# Altium PCB ButtonPad.PcbDoc
Units mil, origin at the board's own origin, x right, y up, seen from the top; angles counter-clockwise.
Board outline 3100 x 3810.63 mil, 2 copper layers (Top Layer, Bottom Layer), stack 61.756 mil thick; 21 components, 17 nets, 85 pads, 0 vias.
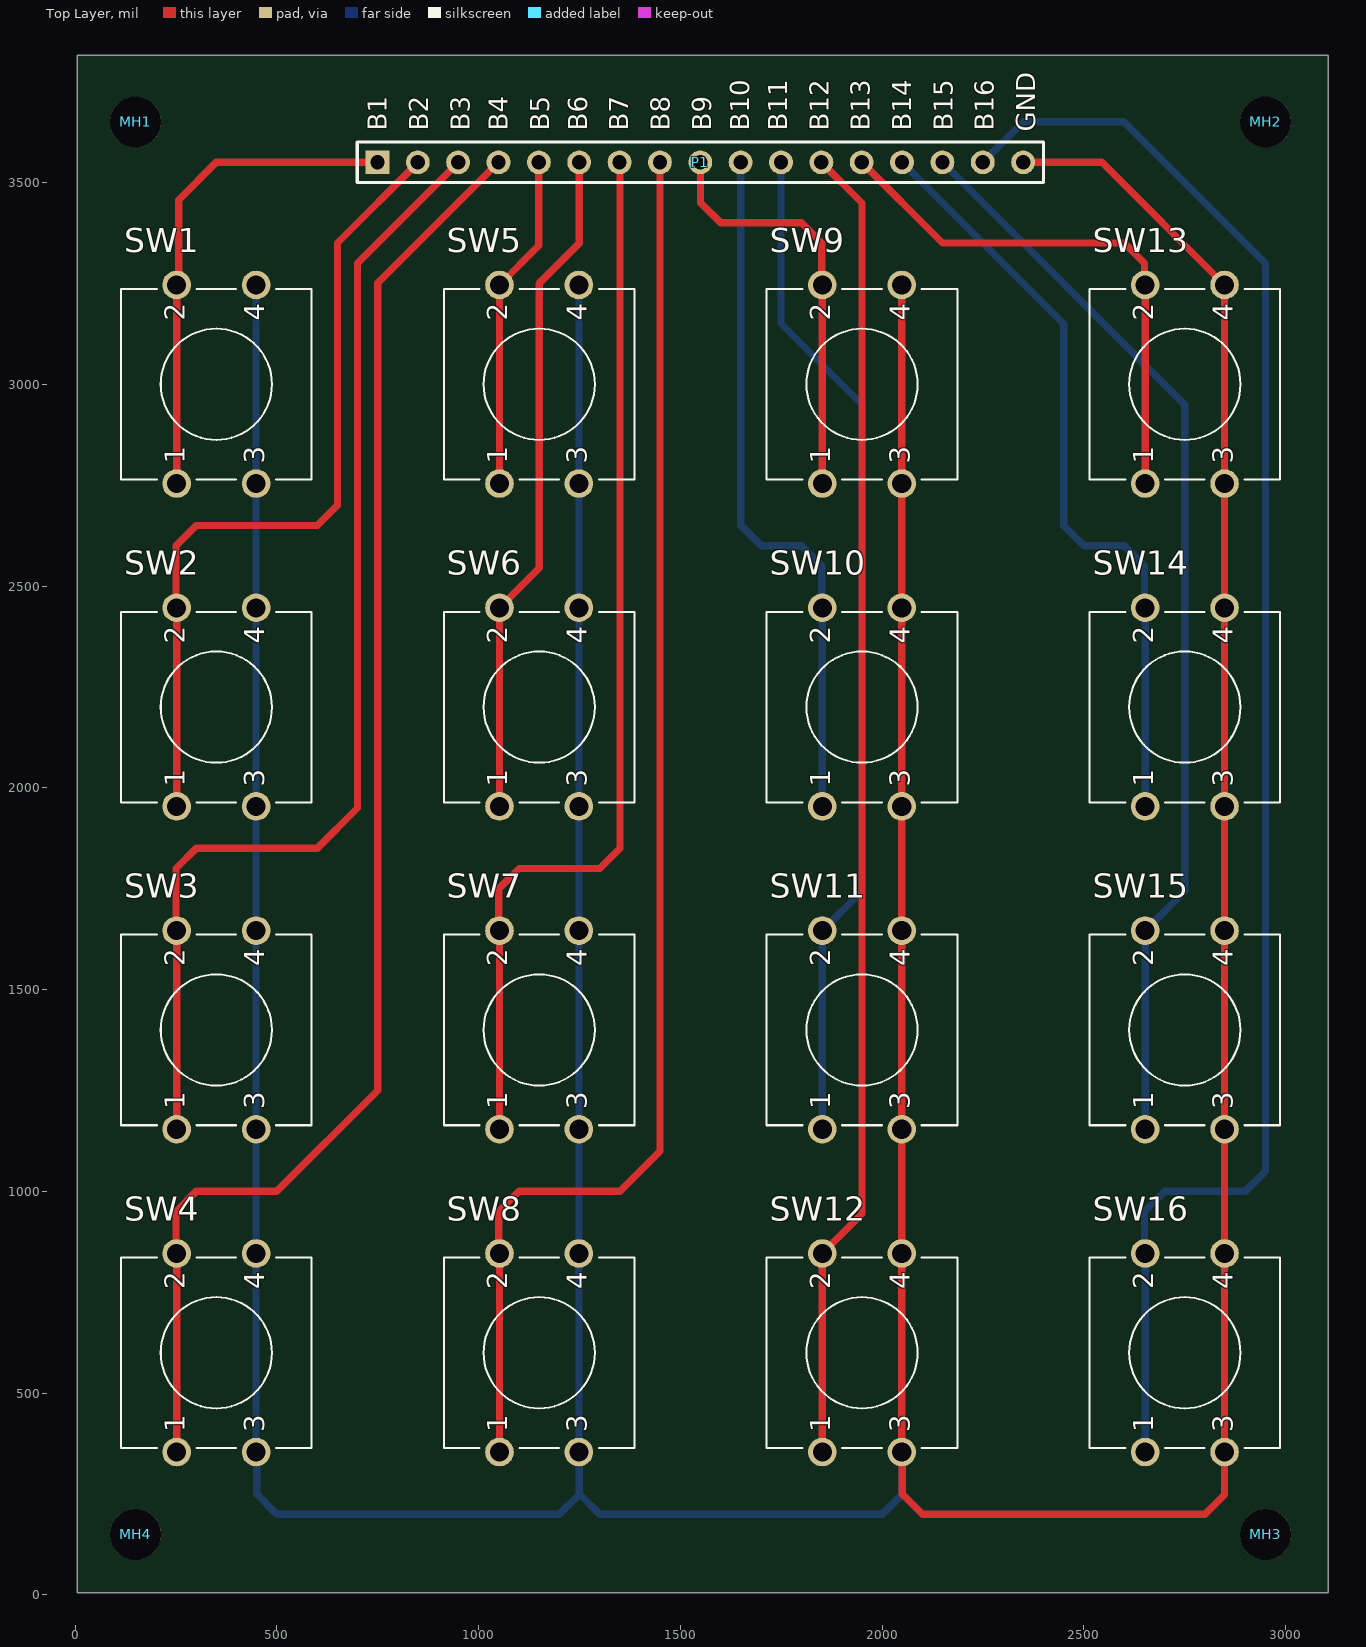
[diagram p0: Top Layer view]
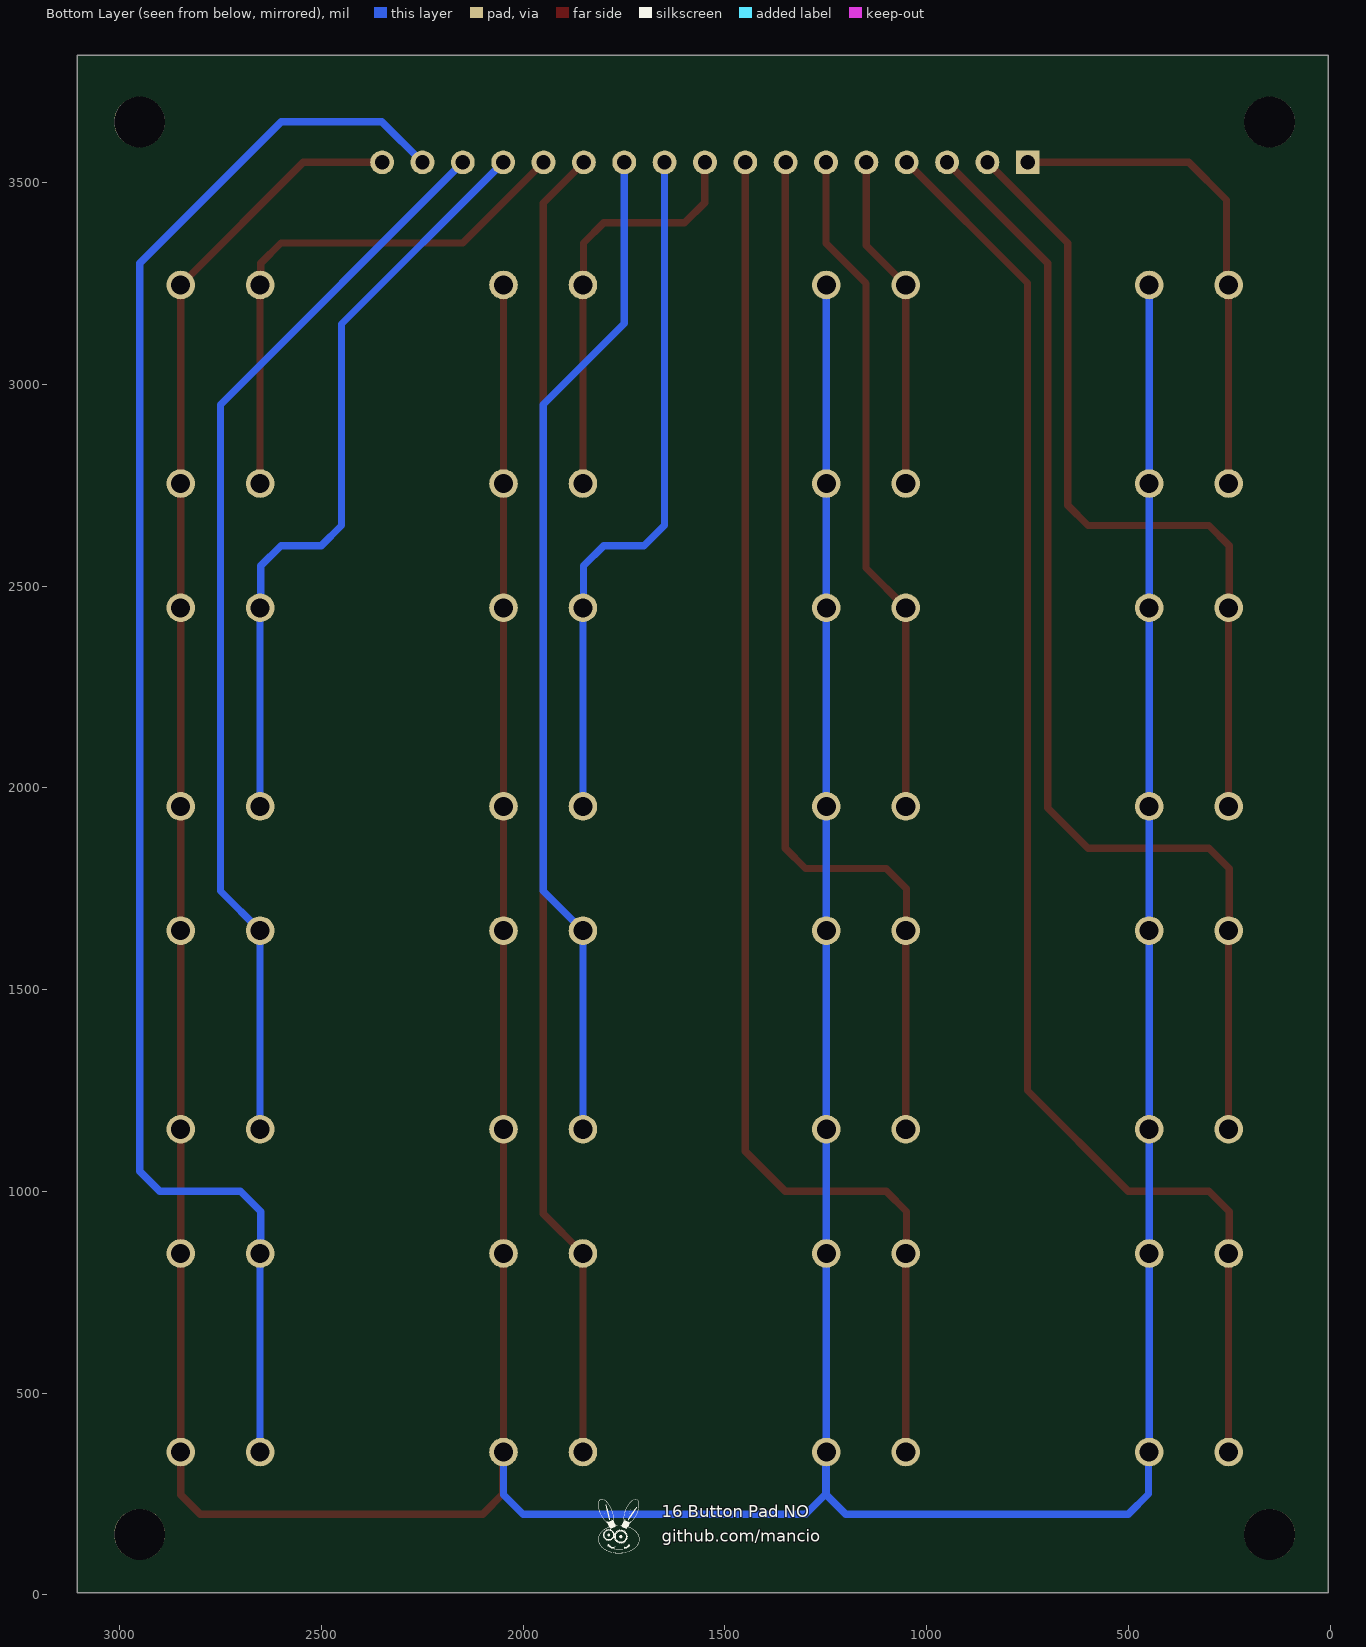
[diagram p1: Bottom Layer view, seen from below]
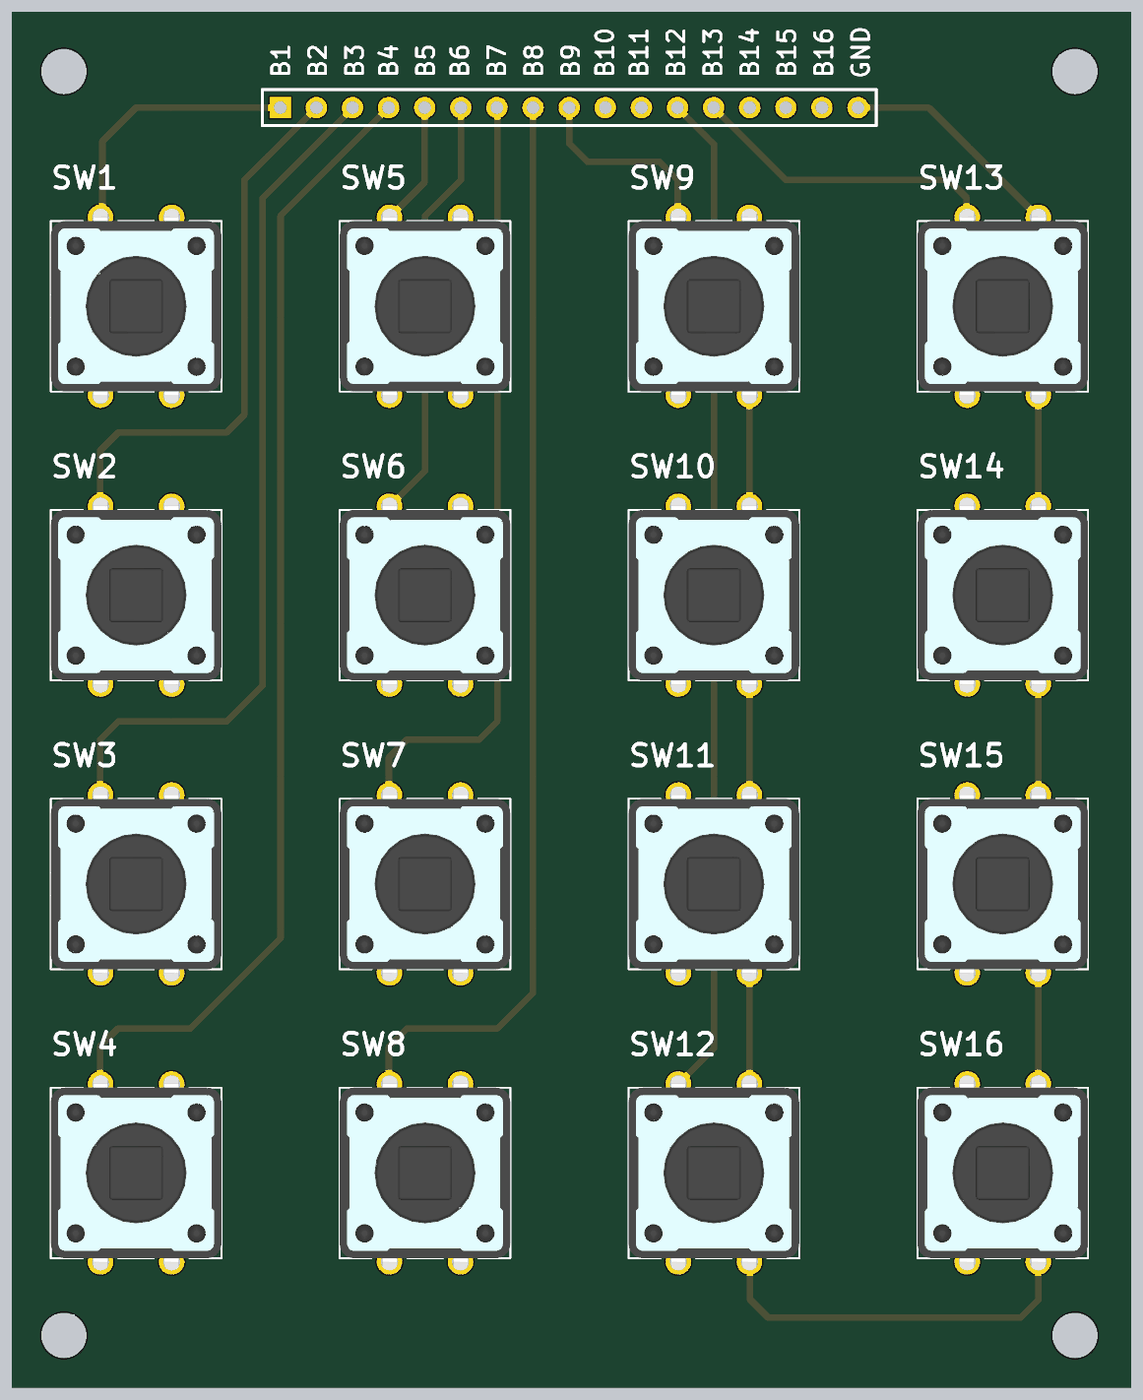
[diagram p2: 3D render of the assembled board from above, using the file's embedded part models]

## Layer stack, top to bottom
Top Solder: solder mask 1, SM-001, Dk 4
Top Layer: signal copper 1.378
Dielectric 1: core 59, Core-043, Dk 4.3
Bottom Layer: signal copper 1.378
Bottom Solder: solder mask 1, SM-001, Dk 4

## Board outline
5,5 3105,5 3105,3815.63 5,3815.63

## Design rules (kind name [scope] priority, off if disabled: settings)
Clearance [All] p1: gap=10 ignorepadtopadclearanceinfootprint=FALSE except(0: Arc-Hole Track-Hole SMDPad-Hole THPad-Hole Via-Hole Fill-Hole Poly-Hole Region-Hole Text-Hole)
PolygonConnect [All] p1: connectstyle=Relief reliefconductorwidth=10 reliefentries=4 polygonreliefangle="90 Angle" airgapwidth=10
RoutingVias [All] p1: holewidth=28 width=50 viastyle="Through Hole" minholewidth=28 minwidth=50 maxholewidth=28 maxwidth=50
SolderMaskExpansion [All] p1: expansion=4 istentingtop=FALSE
Width [All] p1: maxlimit=17.99 minlimit=12.01 preferedwidth=17.99 minimp=50.000000 maximp=50.000000 favimp=50.000000
30 further rules are at their usual default settings.

## Components (designator, comment, footprint, x,y, rotation, side; value= is the part's Value field where it differs from the comment)
MH1 "Mounting Hole 3.2mm Drill" MH_3.2MMD 150,3650 r0 top
MH2 "Mounting Hole 3.2mm Drill" MH_3.2MMD 2950,3650 r0 top
MH3 "Mounting Hole 3.2mm Drill" MH_3.2MMD 2950,150 r0 top
MH4 "Mounting Hole 3.2mm Drill" MH_3.2MMD 150,150 r0 top
P1 "Header_16_Keyboard_plusGND" HDR1X16_Buttons_plusGND 1450,3550 r0 top
SW1 "430456073736" 430456073736 350,3000 r90 top
SW2 "430456073736" 430456073736 350,2200 r90 top
SW3 "430456073736" 430456073736 350,1400 r90 top
SW4 "430456073736" 430456073736 350,600 r90 top
SW5 "430456073736" 430456073736 1150,3000 r90 top
SW6 "430456073736" 430456073736 1150,2200 r90 top
SW7 "430456073736" 430456073736 1150,1400 r90 top
SW8 "430456073736" 430456073736 1150,600 r90 top
SW9 "430456073736" 430456073736 1950,3000 r90 top
SW10 "430456073736" 430456073736 1950,2200 r90 top
SW11 "430456073736" 430456073736 1950,1400 r90 top
SW12 "430456073736" 430456073736 1950,600 r90 top
SW13 "430456073736" 430456073736 2750,3000 r90 top
SW14 "430456073736" 430456073736 2750,2200 r90 top
SW15 "430456073736" 430456073736 2750,1400 r90 top
SW16 "430456073736" 430456073736 2750,600 r90 top

## Footprints (in the part's own frame and the unit in brackets; to place one, negate y for a bottom-side part, rotate by r counter-clockwise, add the part's x,y. Pads: shape width x height; smd on the part's side, far side on the other; paste and mask are expansions set on the pad)
430456073736 [mm] "12*12mm vertical type,THT,  height 7.3mm, square salmon actuator, 360gf, Bulk"
  round 1.8 hole 1.2: 1(-6.25,2.5) 2(6.25,2.5) 3(-6.25,-2.5) 4(6.25,-2.5)
  silkscreen extent -6,-6 6,6, body extent -6.99,-6 6.99,6, height 7.4
HDR1X16_Buttons_plusGND [mm]
  rect 1.5x1.5 hole 0.9: 1(-17.8,0)
  round 1.5 hole 0.9: 2(-15.26,0) 3(-12.72,0) 4(-10.18,0) 5(-7.64,0) 6(-5.1,0) 7(-2.56,0) 8(-0.02,0) 9(2.52,0) 10(5.06,0) 11(7.6,0) 12(10.14,0) 13(12.68,0) 14(15.22,0) 15(17.76,0) 16(20.3,0) 17(22.84,0)
  silkscreen extent -19.07,-1.27 24.13,1.27
MH_3.2MMD [mm]
  round 3.2 hole 3.2 unplated: 1(0,0)

## Part data
MH1 MH2 MH3 MH4: library part MH_3.2MMD
SW1 SW2 SW3 SW4 SW5 SW6 SW7 SW8 SW9 SW10 SW11 SW12 SW13 SW14 SW15 SW16: "WS-TATV THT Tact Switch 12X12 mm", Manufacturer="Wuerth Elektronik", ComponentLink1Description="Manufacturer URL", ComponentLink1URL=http://www.we-online.com, ComponentLink2Description=Datasheet, ComponentLink2URL=http://katalog.we-online.de/em/datasheet/430456073736.pdf, NoPins=04, PackageReference=430456073736, PartNumber=430456073736

## Nets (pads, with @x,y where several pads share a name; then routed paths per layer and width w, separated by ;. In a path a pad name is that pad's centre, name@x,y a point inside that pad or via, vN(x,y) a via of type N, cw(c..) or ccw(c..) an arc to the next point about the centre after c; other vN are vias at no path point)
NetP1_1: P1.1 SW1.1 SW1.2 | length 1229.8
  Top Layer w17.99: SW1.1 SW1.2 ; SW1.2@256.57,3251.06 256.57,3456.57 350,3550 P1.1@750,3550
NetP1_2: P1.2 SW2.1 SW2.2 | length 2018.1
  Top Layer w17.99: SW2.1 SW2.2 ; SW2.2@256.57,2451.06 250,2457.64 250,2600 300,2650 600,2650 650,2700 650,3350 P1.2@850,3550
NetP1_3: P1.3 SW3.1 SW3.2 | length 2862.4
  Top Layer w17.99: SW3.1 SW3.2 250,1647.64 250,1800 300,1850 600,1850 700,1950 700,3300 P1.3@950,3550
NetP1_4: P1.4 SW4.1 SW4.2 | length 3644.9
  Top Layer w17.99: SW4.1 SW4.2 250,847.64 250,950 300,1000 500,1000 750,1250 750,3250.79 P1.4
NetP1_5: P1.5 SW5.1 SW5.2 | length 836.5
  Top Layer w17.99: SW5.1 SW5.2 1149.21,3343.7 P1.5
NetP1_6: P1.6 SW6.1 SW6.2 | length 1677.9
  Top Layer w17.99: SW6.1 SW6.2 1150,2544.49 1150,3250 1249.21,3349.21 P1.6
NetP1_7: P1.7 SW7.1 SW7.2 | length 2638.5
  Top Layer w17.99: SW7.1 SW7.2 1050,1647.64 1050,1750 1100,1800 1300,1800 1350,1850 1350,3549.21 P1.7
NetP1_8: P1.8 SW8.1 SW8.2 | length 3508.5
  Top Layer w17.99: SW8.1 SW8.2 1050,847.64 1050,950 1100,1000 1350,1000 1449.21,1099.21 P1.8
NetP1_9: P1.9 SW9.1 SW9.2 | length 1039.3
  Top Layer w17.99: P1.9@1549.21,3549.21 P1.9 1550,3549.21 1550,3450 1600,3400 1800,3400 1850,3350 1850,3247.64 SW9.2 SW9.1
NetP1_10: P1.10 SW10.1 SW10.2 | length 1738.5
  Bottom Layer w17.99: P1.10 1649.21,2650.79 1700,2600 1800,2600 1850,2550 1850,2447.64 SW10.2 SW10.1
NetP1_11: P1.11 SW11.1 SW11.2 | length 2520
  Bottom Layer w17.99: P1.11 1749.21,3150.79 1950,2950 1950,1744.49 SW11.2 SW11.1
NetP1_12: P1.12 SW12.1 SW12.2 | length 3278.6
  Top Layer w17.99: P1.12 1950,3449.21 1950,944.49 SW12.2 SW12.1
NetP1_13: P1.13 SW13.1 SW13.2 | length 1351.1
  Top Layer w17.99: P1.13 2149.21,3350 2600,3350 2650,3300 2650,3247.64 SW13.2 SW13.1
NetP1_14: P1.14 SW14.1 SW14.2 | length 1904.1
  Bottom Layer w17.99: P1.14 2450,3149.21 2450,2650 2500,2600 2600,2600 2650,2550 2650,2447.64 SW14.2 SW14.1
NetP1_15: P1.15 SW15.1 SW15.2 | length 2685.7
  Bottom Layer w17.99: P1.15 2750,2949.21 2750,1744.49 SW15.2 SW15.1
NetP1_16: P1.16 SW16.1 SW16.2 | length 4076
  Bottom Layer w17.99: P1.16 2350,3650.79 2599.21,3650.79 2950,3300 2950,1050 2900,1000 2700,1000 2650,950 2650,847.64 SW16.2 SW16.1
NetP1_17: P1.17 SW1.3 SW1.4 SW2.3 SW2.4 SW3.3 SW3.4 SW4.3 SW4.4 SW5.3 SW5.4 SW6.3 SW6.4 SW7.3 SW7.4 SW8.3 SW8.4 SW9.3 SW9.4 SW10.3 SW10.4 SW11.3 SW11.4 SW12.3 SW12.4 SW13.3 SW13.4 SW14.3 SW14.4 SW15.3 SW15.4 SW16.3 SW16.4 | length 15343.7
  Top Layer w17.99: SW8.3 SW8.3@1250,352.36 ; SW9.4 SW9.3 SW10.4 SW10.3 SW11.4 SW11.3 SW12.4 SW12.3 2050,352.36 2050,250 2100,200 2800,200 2848.43,248.43 SW16.3 SW16.4 SW15.3 SW15.4 SW14.3 SW14.4 SW13.3 SW13.4 2544.49,3550 P1.17
  Bottom Layer w17.99: SW1.4 SW1.3 SW2.4 SW2.3 SW3.4 SW3.3 SW4.4 SW4.3 450,352.36 450,250 500,200 1200,200 1248.43,248.43 SW8.3 ; SW5.4 SW5.3 SW6.4 SW6.3 SW7.4 SW7.3 SW8.4 SW8.3 ; SW12.3 2048.43,248.43 2000,200 1300,200 1250,250 1250,352.36 SW8.3
pads on no net: MH1.1 MH2.1 MH3.1 MH4.1

## Silkscreen, mask and mechanical layers (free items; w line width, h text height)
Bottom Overlay:
  drawing of 8 lines, arcs and shapes, not listed
  text "16 Button Pad NO" at 1656.26,192.41 h30
  text "github.com/mancio" at 1656.26,131.4 h30
Outline Board:
  the board outline again, w10

## Dimensions
3105,3815.63 to 3105,5 on Mechanical 15
5,3815.63 to 3105,3815.63 on Mechanical 15
487.8,1400 to 487.8,2200 on Mechanical 15
1150,3000 to 1950,3137.8 on Mechanical 15
2087.8,3000 to 2887.8,3000 on Mechanical 15
487.8,600 to 350,1400 on Mechanical 15
350,3000 to 1150,3000 on Mechanical 15
350,3000 to 487.8,2200 on Mechanical 15

## Text inside footprints (layer, text, board x,y; h text height)
P1: Top Overlay "GND" at 2379.08,3626.15 h47.24 r90; Top Overlay "B16" at 2276.77,3628.74 h47.24 r90; Top Overlay "B15" at 2174.41,3628.74 h47.24 r90; Top Overlay "B14" at 2072.05,3628.74 h47.24 r90; Top Overlay "B13" at 1969.68,3628.74 h47.24 r90; Top Overlay "B11" at 1764.96,3628.74 h47.24 r90; Top Overlay "B12" at 1867.32,3628.74 h47.24 r90; Top Overlay "B9" at 1575.98,3628.74 h47.24 r90; Top Overlay "B10" at 1670.47,3628.74 h47.24 r90; Top Overlay "B8" at 1473.62,3628.74 h47.24 r90; Top Overlay "B6" at 1268.9,3628.74 h47.24 r90; Top Overlay "B7" at 1371.26,3628.74 h47.24 r90; Top Overlay "B4" at 1072.05,3628.74 h47.24 r90; Top Overlay "B5" at 1174.41,3628.74 h47.24 r90; Top Overlay "B3" at 977.56,3628.74 h47.24 r90; Top Overlay "B1" at 772.84,3628.74 h47.24 r90; Top Overlay "B2" at 875.2,3628.74 h47.24 r90
SW1: Top Overlay "1" at 271.26,2803.15 h50 r90; Top Overlay "2" at 271.26,3157.48 h50 r90; Top Overlay "3" at 468.11,2803.15 h50 r90; Top Overlay "4" at 468.11,3157.48 h50 r90
SW2: Top Overlay "1" at 271.26,2003.15 h50 r90; Top Overlay "2" at 271.26,2357.48 h50 r90; Top Overlay "3" at 468.11,2003.15 h50 r90; Top Overlay "4" at 468.11,2357.48 h50 r90
SW3: Top Overlay "1" at 271.26,1203.15 h50 r90; Top Overlay "2" at 271.26,1557.48 h50 r90; Top Overlay "3" at 468.11,1203.15 h50 r90; Top Overlay "4" at 468.11,1557.48 h50 r90
SW4: Top Overlay "1" at 271.26,403.15 h50 r90; Top Overlay "2" at 271.26,757.48 h50 r90; Top Overlay "3" at 468.11,403.15 h50 r90; Top Overlay "4" at 468.11,757.48 h50 r90
SW5: Top Overlay "4" at 1268.11,3157.48 h50 r90; Top Overlay "3" at 1268.11,2803.15 h50 r90; Top Overlay "2" at 1071.26,3157.48 h50 r90; Top Overlay "1" at 1071.26,2803.15 h50 r90
SW6: Top Overlay "1" at 1071.26,2003.15 h50 r90; Top Overlay "2" at 1071.26,2357.48 h50 r90; Top Overlay "3" at 1268.11,2003.15 h50 r90; Top Overlay "4" at 1268.11,2357.48 h50 r90
SW7: Top Overlay "1" at 1071.26,1203.15 h50 r90; Top Overlay "2" at 1071.26,1557.48 h50 r90; Top Overlay "3" at 1268.11,1203.15 h50 r90; Top Overlay "4" at 1268.11,1557.48 h50 r90
SW8: Top Overlay "1" at 1071.26,403.15 h50 r90; Top Overlay "2" at 1071.26,757.48 h50 r90; Top Overlay "3" at 1268.11,403.15 h50 r90; Top Overlay "4" at 1268.11,757.48 h50 r90
SW9: Top Overlay "1" at 1871.26,2803.15 h50 r90; Top Overlay "2" at 1871.26,3157.48 h50 r90; Top Overlay "3" at 2068.11,2803.15 h50 r90; Top Overlay "4" at 2068.11,3157.48 h50 r90
SW10: Top Overlay "1" at 1871.26,2003.15 h50 r90; Top Overlay "2" at 1871.26,2357.48 h50 r90; Top Overlay "3" at 2068.11,2003.15 h50 r90; Top Overlay "4" at 2068.11,2357.48 h50 r90
SW11: Top Overlay "1" at 1871.26,1203.15 h50 r90; Top Overlay "2" at 1871.26,1557.48 h50 r90; Top Overlay "3" at 2068.11,1203.15 h50 r90; Top Overlay "4" at 2068.11,1557.48 h50 r90
SW12: Top Overlay "1" at 1871.26,403.15 h50 r90; Top Overlay "2" at 1871.26,757.48 h50 r90; Top Overlay "3" at 2068.11,403.15 h50 r90; Top Overlay "4" at 2068.11,757.48 h50 r90
SW13: Top Overlay "1" at 2671.26,2803.15 h50 r90; Top Overlay "2" at 2671.26,3157.48 h50 r90; Top Overlay "3" at 2868.11,2803.15 h50 r90; Top Overlay "4" at 2868.11,3157.48 h50 r90
SW14: Top Overlay "1" at 2671.26,2003.15 h50 r90; Top Overlay "2" at 2671.26,2357.48 h50 r90; Top Overlay "3" at 2868.11,2003.15 h50 r90; Top Overlay "4" at 2868.11,2357.48 h50 r90
SW15: Top Overlay "1" at 2671.26,1203.15 h50 r90; Top Overlay "2" at 2671.26,1557.48 h50 r90; Top Overlay "3" at 2868.11,1203.15 h50 r90; Top Overlay "4" at 2868.11,1557.48 h50 r90
SW16: Top Overlay "1" at 2671.26,403.15 h50 r90; Top Overlay "2" at 2671.26,757.48 h50 r90; Top Overlay "3" at 2868.11,403.15 h50 r90; Top Overlay "4" at 2868.11,757.48 h50 r90